# Altium PCB dimmer.PcbDoc
Units mm, origin at the board's own origin, x right, y up, seen from the top; angles counter-clockwise.
Board outline 22.86 x 45.59 mm, 2 copper layers (Top Layer, Bottom Layer); 35 components, 23 nets, 83 pads, 16 vias.
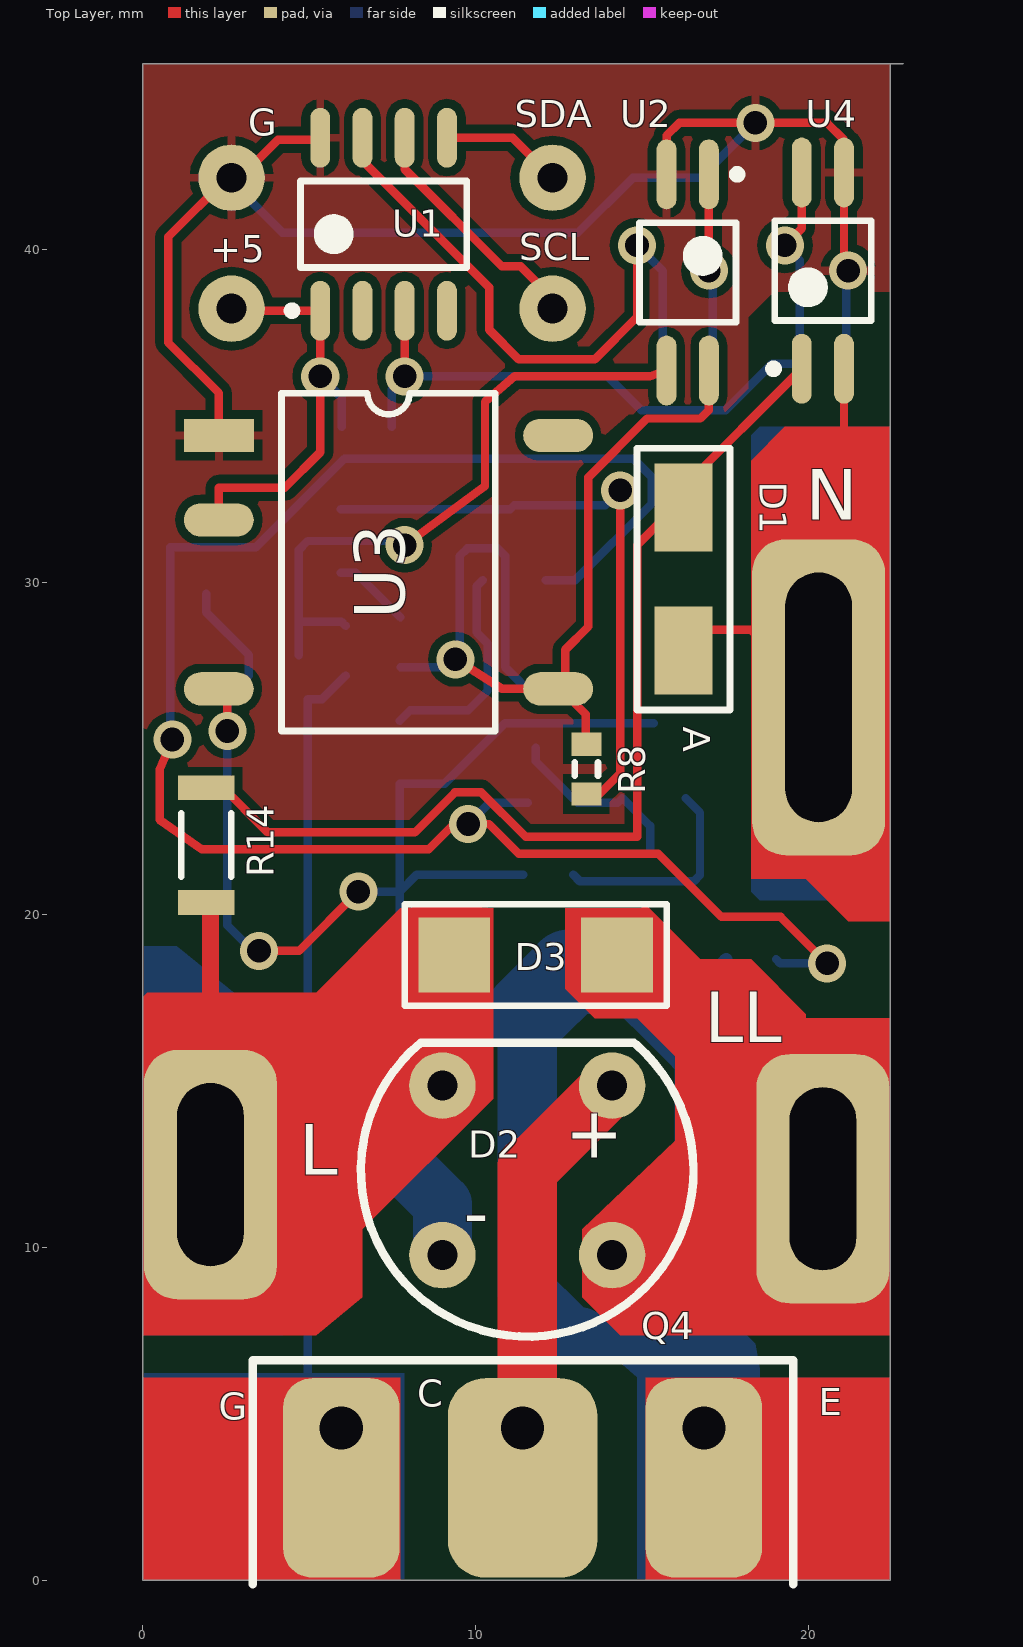
[diagram p0: Top Layer view]
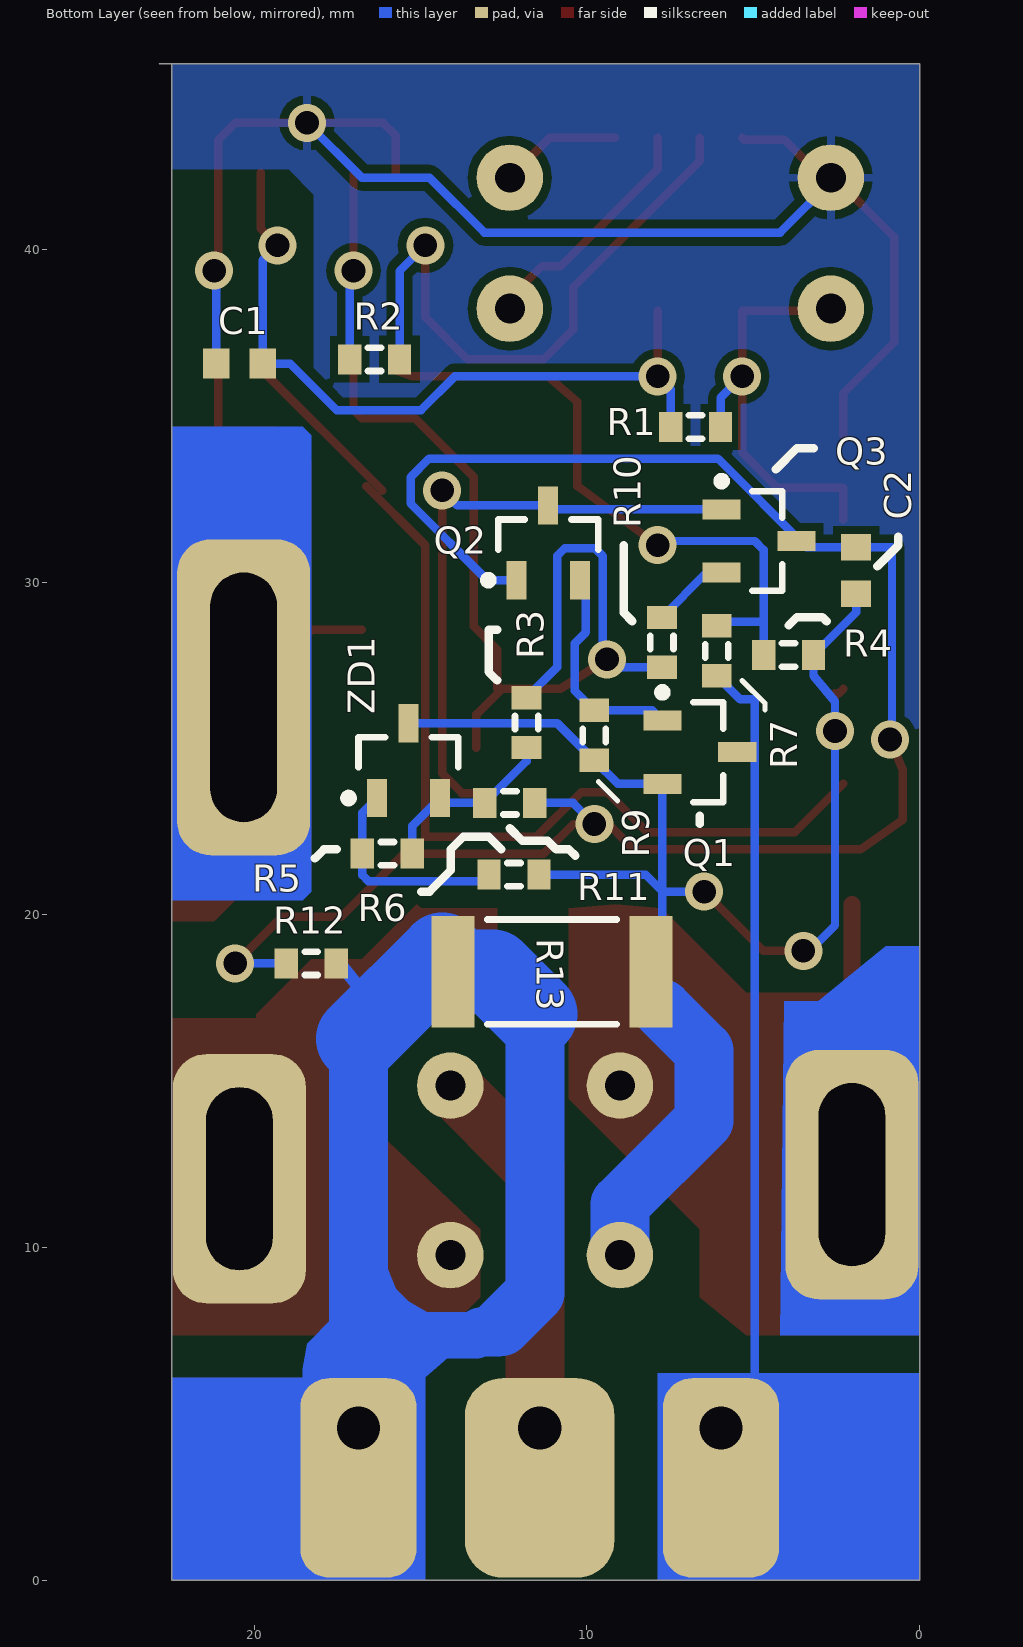
[diagram p1: Bottom Layer view, seen from below]

## Layer stack, top to bottom
Top Layer: signal copper 0.0356
Dielectric: dielectric 0.32, FR-4, Dk 4.8
Bottom Layer: signal copper 0.0356

## Board outline
0,0 0,45.593 22.86,45.593 22.479,45.593 22.479,0

## Design rules (kind name [scope] priority, off if disabled: settings)
Clearance Clearance_mains [InNetClass('mains')] p1: gap=0.635
Clearance [All] p2: gap=0.254
ComponentClearance ComponentClearance_dense [(HasFootprint('2W10G') OR HasFootprint('MAINSPIN1') OR HasFootprint('FGA20S140P') OR HasFootprint('MAINSPIN2x') OR HasFootprint('MAINSPIN3x') OR HasFootprint('PIN1'))] p1: gap=0 collisioncheckmode=3 verticalgap=2540 showdistances=FALSE
ComponentClearance [All] p2: gap=0.254 collisioncheckmode=3 verticalgap=0.254 showdistances=FALSE
HoleSize [All] p1: absolutevalues=TRUE maxlimit=12.7 minlimit=0.025 maxpercent=80.000 minpercent=20.000
PolygonConnect [All] p1: connectstyle=Relief reliefconductorwidth=0.254 reliefentries=4 polygonreliefangle="90 Angle" airgapwidth=0.254
RoutingPriority RoutingPriority_1 [All] p1: routingpriority=1
RoutingPriority RoutingPriority_mains [InNetClass('mains')] p2: routingpriority=0
RoutingVias [All] p1: holewidth=0.711 width=1.143 viastyle="Through Hole" minholewidth=0.711 minwidth=1.143 maxholewidth=0.711 maxwidth=1.143
SilkToSolderMaskClearance [IsPad] p1: minsilkscreentomaskgap=0.097 clearancetoexposedcopper=TRUE
SolderMaskExpansion [All] p1: expansion=0.102
SupplyNets [InNetClass('mains')] p1: voltage=240.0
Width mains_width [InNetClass('mains')] p1: maxlimit=25.4 minlimit=0.254 preferedwidth=1.27 checkconnectedcopper=TRUE
Width [All] p2: maxlimit=2.54 minlimit=0.254 preferedwidth=0.254 checkconnectedcopper=TRUE
24 further rules are at their usual default settings.

## Classes and differential pairs
from-to class mains-fromto: "NetC2_1 (R13-1 : D2-3)" "NetQ4_3 (R13-2 : Q4-3)"
net class mains: NetD2_1 NetD2_2 NetD2_4

## Components (designator, comment, footprint, x,y, rotation, side; value= is the part's Value field where it differs from the comment)
+5 "Socket" PIN1 2.667,38.227 r0 top
C1 "Cap Semi" 1608[0603] 20.447,36.576 r180 bottom
C2 "Cap Semi" 1608[0603] 1.905,30.353 r90 bottom
D1 "S1A" DO-214AC 16.256,30.099 r90 top
D2 "2W10G" 2W10G 11.557,12.319 r0 top
D3 "SMBJ440CA" DO-214AA 11.811,18.796 r180 top
G "Socket" PIN1 2.667,42.164 r90 top
L "PWRCON2X" MAINSPIN2X 2.032,12.192 r90 top
LL "PWRCON" MAINSPIN1 20.447,12.065 r90 top
N "PWRCON2X" MAINSPIN3X 20.32,26.543 r90 top
Q1 "BC847" SOT-23_N 6.604,24.892 r180 bottom
Q2 "BC847" SOT-23_N 11.164,31.188 r90 bottom
Q3 "BC857" SOT-23_N 4.826,31.242 r180 bottom
Q4 "FGA20S140P" FGA20S140P 5.969,4.572 r0 top
R1 "Res3" J1-0603 6.731,34.671 r0 bottom
R2 "Res3" J1-0603 16.383,36.703 r180 bottom
R3 "Res3" J1-0603 11.811,25.781 r270 bottom
R4 "Res3" J1-0603 3.937,27.813 r180 bottom
R5 "Res3" J1-0603 16.002,21.844 r0 bottom
R6 "Res3" J1-0603 12.192,21.209 r180 bottom
R7 "Res3" J1-0603 6.096,27.94 r270 bottom
R8 "Res3" J1-0603 13.335,24.384 r270 top
R9 "Res3" J1-0603 9.779,25.4 r270 bottom
R10 "Res3" J1-0603 7.747,28.194 r90 bottom
R11 "Res3" J1-0603 12.319,23.368 r180 bottom
R12 "Res3" J1-0603 18.288,18.542 r180 bottom
R13 "2W" R2512 11.049,18.288 r0 bottom
R14 "1/4W" R1206 1.905,22.098 r90 top
SCL "Socket" PIN1 12.319,38.227 r0 top
SDA "Socket" PIN1 12.319,42.164 r0 top
U1 "PIC12F1840" SOIC150-8_N 7.239,40.767 r90 top
U2 "PC3H71" PC3H71 16.383,39.316 r270 top
U3 "PDS1-M" PDS1-M 2.286,34.417 r0 top
U4 "PC3H71" PC3H71 20.447,39.37 r90 top
ZD1 "TLV431A" SOT-23_N 15.367,24.638 r90 bottom

## Footprints (in the part's own frame and the unit in brackets; to place one, negate y for a bottom-side part, rotate by r counter-clockwise, add the part's x,y. Pads: shape width x height; smd on the part's side, far side on the other; paste and mask are expansions set on the pad)
2W10G [mm]
  round 2 hole 0.9: 1(2.55,2.55) 2(2.55,-2.55) 3(-2.55,-2.55) 4(-2.55,2.55)
  silkscreen extent -5,-5 5,3.84
1608[0603] [mm] "Chip Capacitor, Body 1.6x0.8mm, IPC High Density"
  rect 0.8x0.9 smd: 1(-0.7,0) 2(0.7,0)
  body extent -0.87,-0.48 0.87,0.48, height 1.3
DO-214AA [mm]
  rect 2.16x2.26 smd: 1(-2.45,0) 2(2.45,0)
  silkscreen extent -3.94,-1.52 3.94,1.52
DO-214AC [mm]
  rect 2.65x1.75 smd: 1(-2.15,0) 2(2.15,0)
  silkscreen extent -3.94,-1.4 3.94,1.4
FGA20S140P [mm]
  rrect50% 3.5x6 hole 1.3 copper offset 0,-1.5: 1(0,0) 3(10.9,0)
  rrect50% 4.5x6 hole 1.3 copper offset 0,-1.5: 2(5.45,0)
  silkscreen extent -2.67,-4.7 13.59,2.03
J1-0603 [mm] "Chip Resistor, Body 1.6x0.8mm, IPC High Density"
  rect 0.7x0.9 smd: 1(-0.75,0) 2(0.75,0)
  silkscreen extent -0.2,-0.35 0.2,0.35, body extent -0.85,-0.48 0.85,0.48, height 0.9
MAINSPIN1 [mm]
  rrect50% 7.5x4 hole 2 slot 5.5 at 0 deg: 1(0,0)
MAINSPIN2X [mm]
  rrect50% 7.5x4 hole 2 slot 5.5 at 0 deg: 1(0,0)
MAINSPIN3X [mm]
  rrect50% 9.5x4 hole 2 slot 7.5 at 0 deg: 1(0,0)
PC3H71 [mm] "SOIC, 4-Leads, Body 2.60x4.40mm, Pitch 1.27mm, IPC Medium Density"
  oval 2.1x0.6 smd: 1(-2.95,0.635) 2(-2.95,-0.635) 3(2.95,-0.635) 4(2.95,0.635)
  silkscreen extent -3.07,-1.45 1.5,1.61, body extent -2.3,-1.45 2.3,1.45, height 2.2
PDS1-M [mm]
  rect 2.1x1 smd: 1(0,0)
  oval 2.1x1 smd: 2(0,-2.54) 4(0,-7.62) 5(10.2,-7.62) 8(10.2,0)
  silkscreen extent 1.88,-8.89 8.31,1.27
PIN1 [mm] "Connector; Plug"
  round 2 hole 0.9: 1(0,0)
R1206 [mm] "Chip Resistor, 2-Leads, Body 3.20x1.60mm, IPC Medium Density"
  rect 0.75x1.7 smd: 1(-1.725,0) 2(1.725,0)
  silkscreen extent -0.95,-0.75 0.95,0.75, body extent -1.6,-0.8 1.6,0.8, height 0.6
R2512 [mm]
  rect 1.3x3.35 smd: 1(-2.975,0) 2(2.975,0)
  silkscreen extent -1.95,-1.58 1.95,1.58, body extent -3.25,-1.65 3.25,1.65, height 0.6
SOIC150-8_N [mm] "8-Pin Plastic Narrow Body Small Outline Integrated Circuit 1.27 mm Pitch, IPC Medium Density"
  oval 1.8x0.6 smd: 1(-2.6,1.905) 2(-2.6,0.635) 3(-2.6,-0.635) 4(-2.6,-1.905) 5(2.6,-1.905) 6(2.6,-0.635) 7(2.6,0.635) 8(2.6,1.905)
  silkscreen extent -2.72,-2.5 1.3,2.88, body extent -2,-2.5 2,2.5, height 1.76
SOT-23_N [mm] "SOT23, 3-Leads, Body 2.9x1.3mm, Pitch 0.95mm, Lead Span 2.5mm, IPC Medium Density"
  rect 1.15x0.6 smd: 1(-1.125,0.95) 2(-1.125,-0.95) 3(1.125,0)
  silkscreen extent -1.25,-1.5 0.7,1.92, body extent -0.7,-1.5 0.7,1.5, height 1.1

## Part data
C1 C2: "Capacitor (Semiconductor SIM Model)"
D1: library part Diode, "Default Diode"
D2: library part Bridge1, "Full Wave Diode Bridge"
Q1 Q2: library part NPN, "NPN Bipolar Transistor"
Q3: library part PNP, "PNP Bipolar Transistor"
Q4: library part IGBT-N, "Insulated Gate Bipolar Transistor (N-Channel)"
R1 R2 R3 R4 R5 R6 R7 R8 R9 R10 R11 R12: "Resistor"
R13 R14: library part Res3, "Resistor"
U2 U4: library part Optoisolator1, "4-Pin Phototransistor Optocoupler"

## Via types
v1: diameter 1.143, hole 0.711, Top Layer to Bottom Layer, 16 vias

## Nets (pads, with @x,y where several pads share a name; then routed paths per layer and width w, separated by ;. In a path a pad name is that pad's centre, name@x,y a point inside that pad or via, vN(x,y) a via of type N, cw(c..) or ccw(c..) an arc to the next point about the centre after c; other vN are vias at no path point)
Net+5_1: +5.1 R1.1 U1.1 U3.2 | length 13.2
  Top Layer w0.254: U3.2 2.286,32.839 4.264,32.839 5.334,33.909 v1(5.334,36.195) U1.1 2.727,38.167 +5.1
  Bottom Layer w0.254: v1(5.334,36.195) 5.981,35.548 R1.1
NetC1_1: C1.1 G.1 U1.8 U2.2 U3.1 U4.3 | length 44
  Top Layer w0.254: U3.1 2.286,35.687 0.762,37.211 0.762,40.386 2.54,42.164 2.921,42.164 4.064,43.307 5.274,43.307 U1.8 ; U2.2 15.748,43.434 16.129,43.815 v1(18.415,43.815) 20.574,43.815 21.082,43.307 U4.3 21.082,39.497 v1(21.209,39.37)
  Bottom Layer w0.254: G.1@2.54,42.164 4.191,40.513 13.081,40.513 14.732,42.164 16.764,42.164 v1(18.415,43.815) ; C1.1 21.147,39.308 v1(21.209,39.37)
NetC1_2: C1.2 R1.2 U1.3 U4.4 | length 22.7
  Top Layer w0.254: v1(7.874,36.195) U1.3 ; v1(19.304,40.132) 19.812,40.64 U4.4
  Bottom Layer w0.254: R1.2 7.481,35.802 v1(7.874,36.195) 13.97,36.195 14.986,35.179 17.526,35.179 18.923,36.576 C1.2 19.747,39.689 v1(19.304,40.132)
NetC2_1: C2.1 D2.3 Q1.2 R4.2 R6.2 R9.2 R13.1 U3.4 ZD1.3 | length 44.3
  Top Layer w0.254: U3.4 U3.4@2.413,26.67 ; v1@2.54,25.273 v1(2.54,25.527) U3.4@2.54,26.67 ; v1(3.492,18.918) 4.694,18.918 v1(6.477,20.701)
  Bottom Layer w0.254: C2.1 1.905,29.095 R4.2 3.187,27.19 2.54,26.416 v1(2.54,25.527) 2.54,19.685 3.307,18.918 v1(3.492,18.918) ; v1(6.477,20.701) 7.602,20.701 ; R13.1@7.729,19.304 7.729,20.701 ; R6.2 8.237,21.209 7.729,20.701 ; ZD1.3 10.892,25.763 R9.2 9.071,23.942 Q1.2 7.729,20.701
  Bottom Layer w1.778: R13.1@7.73,17.162 6.483,15.914 6.483,13.824 9.007,11.3 D2.3
NetC2_2: C2.2 Q2.1 Q3.3 R11.2 R12.1 | length 54.9
  Top Layer w0.254: v1(0.889,25.273) 0.508,24.384 0.508,22.86 1.778,21.971 8.592,21.971 v1@9.567,22.945 ; v1(9.779,22.733) 10.408,22.733 11.297,21.844 15.494,21.844 17.399,19.939 19.177,19.939 v1(20.574,18.542)
  Bottom Layer w0.254: v1@0.827,25.273 0.827,31.053 C2.2 3.398,31.053 6.064,33.718 14.746,33.718 15.303,33.161 15.303,32.371 12.995,30.063 Q2.1 ; v1(9.779,22.733) 10.414,23.368 R11.2 ; R12.1@19.038,18.669 19.165,18.542 v1(20.574,18.542)
NetD1_1: D1.1 N.1 U4.2 | length 14.6
  Top Layer w0.254: D1.1@16.773,28.575 18.288,28.575 N.1 20.32,32.512 21.082,33.274 U4.2
NetD1_2: D1.2 R14.2 U4.1 | length 30.7
  Top Layer w0.254: R14.2@2.286,23.95 3.757,22.479 8.178,22.479 9.384,23.685 10.174,23.685 11.507,22.352 14.859,22.352 14.859,31.115 D1.2@16.637,32.893 ; D1.2@16.149,32.757 U4.1
NetD2_1: D2.1 Q4.2 | length 11.4
  Top Layer w1.27: Q4.2 Q4.2@11.811,4.964
  Top Layer w1.778: Q4.2@11.557,4.837 11.557,12.446 ; 11.811,12.573 D2.1
NetD2_2: D2.2 D3.1 LL.1 | length 15.3
  Top Layer w1.778: D2.2 16.403,12.065 ; D3.1 16.891,16.166 16.891,12.553 16.403,12.065 ; LL.1 16.403,12.065
NetD2_4: D2.4 D3.2 L.1 R14.1 | length 20.5
  Top Layer w0.508: L.1@2.032,12.012 R14.1@2.032,20.32
  Top Layer w1.27: D3.2@9.007,18.442 D3.2
  Top Layer w1.778: L.1 6.33,12.192 D2.4 D3.2@9.007,18.442
NetQ1_1: Q1.1 Q2.2 R9.1 | length 6.5
  Bottom Layer w0.254: Q1.1 8.037,26.15 R9.1 10.362,26.733 10.362,28.168 10.033,28.497 10.033,29.882 Q2.2
NetQ1_3: Q1.3 Q4.1 R7.2 | length 23.3
  Bottom Layer w0.254: Q4.1@4.953,4.572 4.953,26.485 5.392,26.485 R7.2
NetQ2_3: Q2.3 Q3.1 R8.2 | length 18.4
  Top Layer w0.254: R8.2@13.306,23.663 13.757,23.663 14.351,24.257 v1(14.351,32.766)
  Bottom Layer w0.254: Q3.1 11.043,32.192 Q2.3 13.898,32.313 v1(14.351,32.766)
NetQ3_2: Q3.2 R10.2 | length 2.4
  Bottom Layer w0.254: Q3.2 6.399,30.292 R10.2
NetQ4_3: Q4.3 R12.2 R13.2 | length 33.4
  Bottom Layer w0.254: 16.256,7.239 16.869,7.239
  Bottom Layer w0.381: 16.51,17.399 17.476,18.592 R12.2@17.538,18.669
  Bottom Layer w1.397: 13.208,7.493 13.335,7.366 16.129,7.366 16.256,7.239
  Bottom Layer w1.778: 11.557,17.018 11.557,8.636 12.573,7.62 ; Q4.3 16.869,7.239 ; 16.869,7.366 16.869,16.278
  Bottom Layer w2.54: 11.557,17.018 12.827,18.288 R13.2 ; R13.2@14.351,18.796 16.869,16.278
NetR2_1: R2.1 U2.1 | length 5.6
  Top Layer w0.254: v1(17.018,39.37) U2.1
  Bottom Layer w0.254: v1(17.018,39.37) 17.133,39.255 R2.1
NetR2_2: R2.2 U1.7 | length 18.6
  Top Layer w0.254: U1.7 6.604,42.675 10.414,38.865 10.414,37.592 11.303,36.703 13.589,36.703 14.859,37.973 v1(14.859,40.132)
  Bottom Layer w0.254: v1(14.859,40.132) 15.633,39.358 R2.2
NetR3_1: R3.1 R8.1 R10.1 U2.4 U3.5 | length 29.1
  Top Layer w0.254: v1(9.398,27.686) 10.795,26.797 U3.5 U3.5@12.554,26.797 ; R8.1@13.323,25.019 13.323,26.028 U3.5@12.554,26.797 ; U2.4 17.018,35.179 16.764,34.925 15.163,34.925 13.399,33.161 13.399,28.672 12.7,27.973 12.7,26.797 U3.5@12.554,26.797
  Bottom Layer w0.254: R10.1 9.156,27.444 v1(9.398,27.686) 9.525,27.813 9.525,30.788 9.756,31.019 10.672,31.019 10.895,30.796 10.895,27.447 R3.1
NetR3_2: R3.2 R5.1 R11.1 ZD1.2 | length 5.4
  Bottom Layer w0.254: R3.2 11.811,24.626 R11.1@12.924,23.513 ; R11.1 14.272,23.368 ZD1.2 15.252,22.678 R5.1
NetR4_1: R4.1 R7.1 U2.3 | length 19.3
  Top Layer w0.254: v1(7.874,31.115) 10.287,32.893 10.287,35.433 11.176,36.195 15.24,36.195 U2.3
  Bottom Layer w0.254: R4.1 4.687,28.817 ; R7.1 5.969,28.817 4.687,28.817 ; v1(7.874,31.115) 7.747,31.242 4.953,31.242 4.687,30.976 4.687,28.817
NetR5_2: R5.2 R6.1 ZD1.1 | length 6.5
  Bottom Layer w0.254: R6.1 13.138,21.013 16.568,21.013 16.752,21.197 R5.2 16.752,23.078 ZD1.1
NetSCL_1: SCL.1 U1.6 | length 7.2
  Top Layer w0.254: U1.6 7.874,42.418 10.795,39.497 11.364,39.497 SCL.1@12.434,38.427
NetSDA_1: SDA.1 U1.5 | length 3.7
  Top Layer w0.254: U1.5 11.116,43.367 SDA.1
pads on no net: U1.2 U1.4 U3.8

## Polygon pours and split planes (outlines as drawn)
NetC1_1 on Top Layer "Top Layer-No Net" (solid, remove dead copper, pour order 4): 0,45.593 0,21.971 17.33,21.971 17.33,24.638 14.316,24.638 13.563,25.4 13.563,27.94 13.589,34.163 14.605,35.052 17.456,35.052 18.209,35.814 18.209,37.973 18.963,38.735 22.479,38.735 22.479,45.593
NetC1_1 on Bottom Layer "Top Layer-No Net" (solid, remove dead copper, pour order 6): 0,45.593 0,21.971 16.953,22.098 16.953,25.146 13.312,25.146 13.312,34.163 14.693,35.433 17.205,35.433 18.209,36.449 18.209,41.656 18.963,42.418 22.479,42.418 22.479,45.593

## Other copper
Top Layer:
  rectangle net NetQ1_3: 0,0 7.747,6.096
  rectangle net NetQ4_3: 15.113,0 22.479,6.096
  region net NetD2_4: 0,17.526 0.127,17.653 5.207,17.653 7.747,20.193 9.144,20.32 10.541,20.193 10.541,14.478 6.604,10.541 6.604,8.509 5.207,7.366 0,7.366
  region net NetD2_2: 22.479,16.891 19.939,16.891 19.939,17.018 18.288,18.669 16.764,18.669 15.113,20.32 14.986,20.193 12.7,20.193 12.7,17.78 13.589,16.891 14.859,16.891 16.002,15.748 16.002,13.208 13.208,10.541 13.208,8.509 14.351,7.366 22.479,7.366
  region net NetD1_1: 22.479,34.671 19.304,34.671 18.288,33.655 18.288,21.082 19.939,21.082 21.209,19.812 22.479,19.812
Bottom Layer:
  rectangle net NetQ4_3: 14.859,0 22.479,6.096
  rectangle net NetQ1_3: 0,0 7.874,6.223
  region net NetQ4_3: 14.859,6.096 15.24,5.461 15.24,3.048 18.542,3.048 18.542,6.35 18.415,7.112 17.653,7.874 17.526,7.366 13.843,6.985
  region net NetQ4_3: 13.335,6.731 12.573,6.731 12.573,7.366 13.335,7.366
  region net NetQ4_3: 16.002,7.747 14.605,7.747 14.732,8.001 15.367,8.382 15.748,8.763 16.002,9.398
  region net NetD2_4: 0,19.05 1.016,19.05 1.651,18.542 3.048,17.399 4.064,17.399 4.191,7.366 0,7.366
  region net NetD1_1: 22.479,34.671 18.542,34.671 18.288,34.417 18.288,20.701 18.542,20.447 22.479,20.447

## Silkscreen, mask and mechanical layers (free items; w line width, h text height)
Bottom Overlay:
  lines w0.152: 4.648,26.162 4.648,26.365 5.334,27.051 ; 9.08,23.431 9.652,24.003
  lines w0.254: 0.635,31.369 0.635,31.115 1.27,30.48 ; 2.794,28.829 2.921,28.956 3.683,28.956 3.937,28.702 ; 3.175,34.036 3.683,34.036 4.318,33.401 ; 6.604,22.733 6.604,22.987 ; 8.636,28.829 8.89,29.083 8.89,31.115 ; 10.351,21.78 10.541,21.971 10.922,21.971 11.176,22.225 11.938,22.225 12.319,22.606 ; 12.573,21.971 12.954,22.352 13.716,22.352 14.097,21.971 14.097,21.336 14.732,20.701 14.986,20.701 ; 12.7,27.051 12.954,27.305 12.954,28.575 12.7,28.575 ; 17.526,21.971 17.907,21.971 18.178,21.7
Board:
  lines w1.2: 0,0 22.479,0 22.479,45.593 0,45.593 0,0

## Text inside footprints (layer, text, board x,y; h text height)
D1: Top Overlay "A" at 16.256,25.654 h0.81 r270
D2: Top Overlay "-" at 9.652,10.287 h1.52; Top Overlay "+" at 12.7,12.7 h1.52
Q4: Top Overlay "G" at 2.286,4.826 h0.81; Top Overlay "C" at 8.255,5.207 h0.81; Top Overlay "E" at 20.32,4.953 h0.81